# Altium PCB PFSMPS20.PcbDoc (part 2 of 3)
Units mm, origin at the board's own origin, x right, y up, seen from the top; angles counter-clockwise.
Board outline 225.58 x 155.55 mm, 3 copper layers (Top Layer, Mid-Layer 3, Bottom Layer); 286 components, 176 nets, 1075 pads, 309 vias.
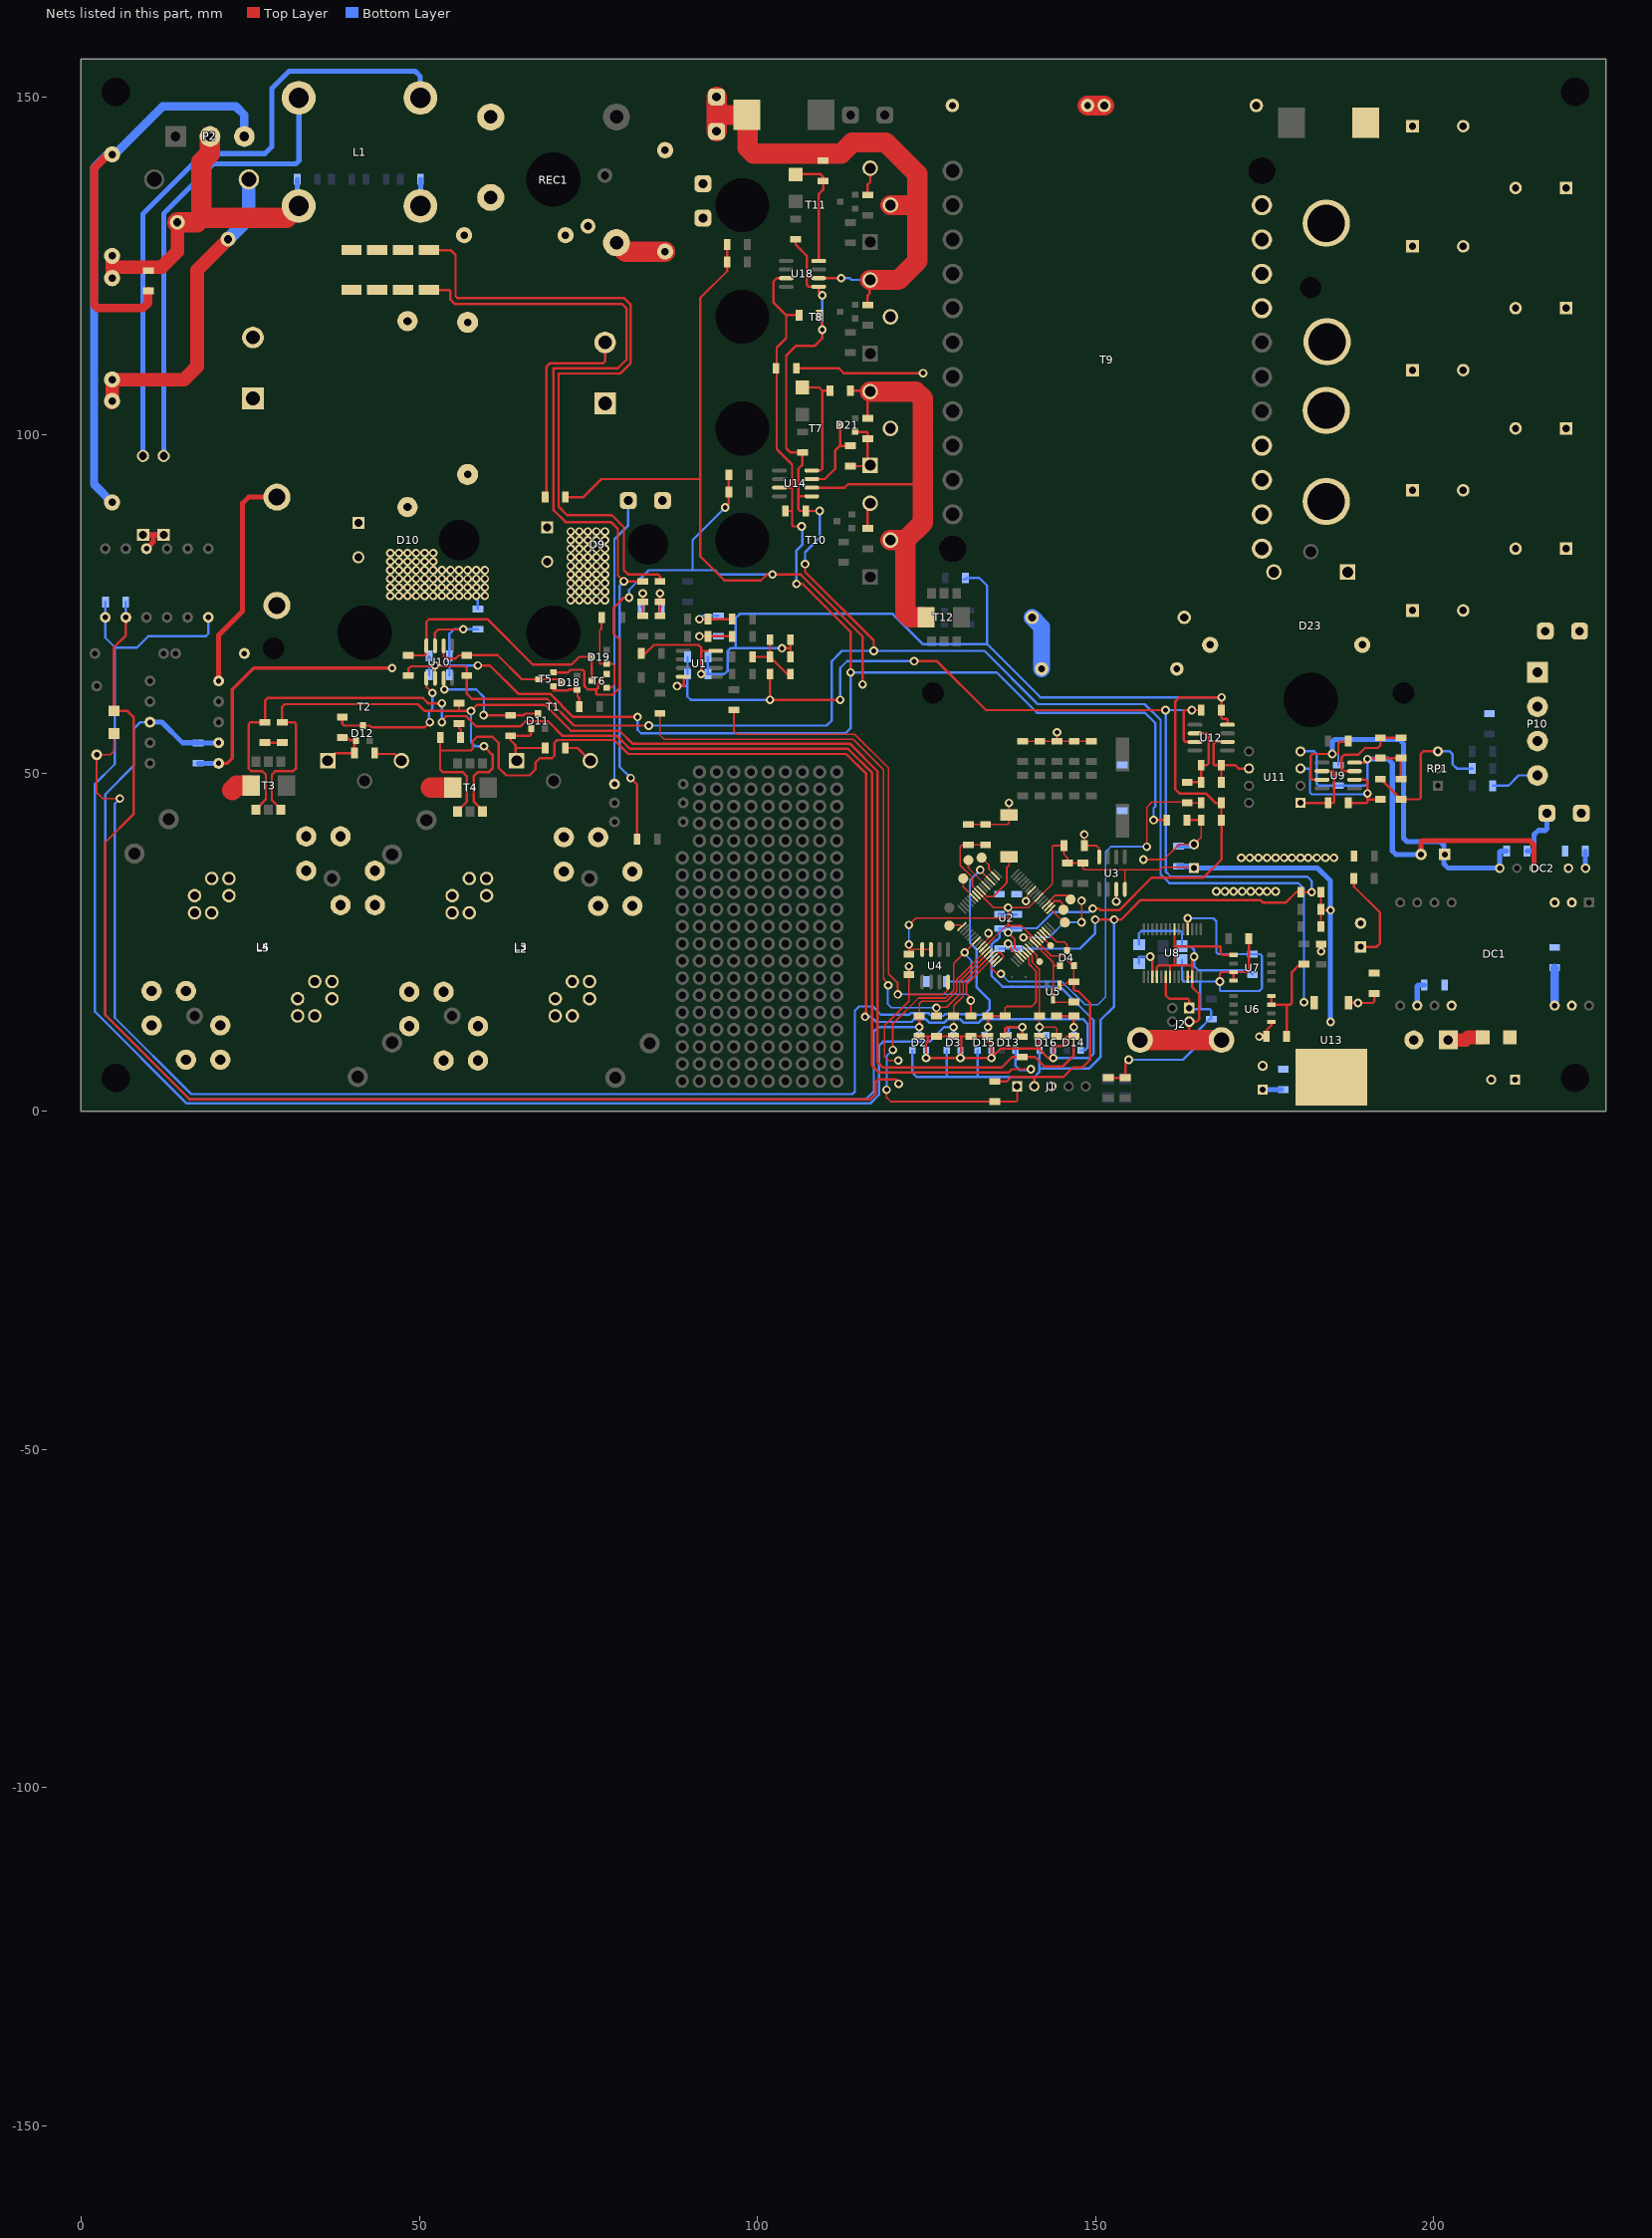
[diagram p2: the nets of this part, all layers, seen from the top]

## Via types
v1: diameter 1.27, hole 0.711, Top Layer to Bottom Layer, 309 vias

## Nets (pads, with @x,y where several pads share a name; then routed paths per layer and width w, separated by ;. In a path a pad name is that pad's centre, name@x,y a point inside that pad or via, vN(x,y) a via of type N, cw(c..) or ccw(c..) an arc to the next point about the centre after c; other vN are vias at no path point)
1: pad.8@128.397,27.432 U2.1 | length 2
  Top Layer w0.254: pad.8@128.397,27.432 128.499,27.534 130.034,27.534 U2.1@130.266,27.302
23: pad.8@141.757,22.123 U2.23 | length 2.6
  Top Layer w0.254: U2.23@140.236,24.12 141.326,23.031 141.326,22.555 pad.8@141.757,22.123
27: U2.27
28: pad.8@143.383,24.509 U2.28 | length 2
  Top Layer w0.254: U2.28@142.004,25.888 pad.8@143.383,24.509
29: U2.29
33: pad.8@145.491,27.915 U2.33 | length 2.9
  Top Layer w0.254: U2.33@143.418,29.848 145.351,27.915 pad.8@145.491,27.915
34: pad.8@145.263,29.794 U2.34 | length 3.6
  Top Layer w0.254: U2.34@143.064,30.201 143.978,31.115 144.729,31.115 145.263,30.582 pad.8@145.263,29.794
35: pad.8@146.329,31.318 U2.35 | length 4.4
  Top Layer w0.254: U2.35@142.711,30.555 144.084,31.928 145.72,31.928 pad.8@146.329,31.318
48V_OUT: C42.1 C43.1 C56.1 C57.1 C58.1 C68.1 C69.1 C71.1 C72.1 C73.2 L8.2 P9.1 P9.2 P10.1 P10.2 R82.1
50: pad.8@133.172,37.49 U2.50 | length 3.5
  Top Layer w0.254: pad.8@133.172,37.49 134.239,36.424 134.239,35.777 135.215,34.801 U2.50@135.215,34.798
54: pad.8@131.216,37.135 U2.54 | length 4.8
  Top Layer w0.254: pad.8@131.216,37.135 131.216,35.968 U2.54@133.801,33.383
58: U2.58
59: pad.8@130.454,34.417 U2.59 | length 3.5
  Top Layer w0.254: pad.8@130.454,34.417 130.454,33.195 U2.59@132.033,31.616
+3.3V: C2.1 C3.2 C13.2 C14.2 C17.2 C18.2 C20.1 C21.1 C22.1 C29.1 C63.1 C66.2 D4.2 J1.2 L7.1 R10.1 R16.1 R17.1 R32.1 R35.1 R75.1 U2.10 U2.26 U2.38 U2.57 U3.8 U4.7 U4.8 U5.1 U6.7 U6.8 U13.2 | length 207.7
  Top Layer w0.254: C20.1@122.428,23.217 122.428,23.876 ; v1(122.428,24.638) 122.428,23.876 ; v1(122.428,27.559) 123.444,28.575 137.096,28.575 ; U4.7@125.666,23.911 U4.8@124.396,23.911 122.463,23.911 122.428,23.876 ; U2.10@133.448,24.12 133.448,24.128 136.751,27.432 137.096,27.432 ; C18.2@133.757,39.394 C14.2@131.217,39.394 130.301,39.394 130.023,39.116 130.023,36.372 131.801,34.594 131.801,33.263 U2.57@132.741,32.323 134.964,30.099 v1(137.096,30.099) ; U5.1@144.714,18.603 145.349,18.603 145.899,19.153 C21.1@146.812,19.153 D4.2@146.812,21.539 146.593,21.539 145.146,22.987 143.49,22.987 U2.26@141.297,25.181 139.045,27.432 137.096,27.432 ; U3.8@154.368,32.803 154.368,35.711 ; C2.1@164.592,35.969 164.493,36.068 159.893,36.068 159.536,35.711 154.368,35.711 ; R32.1@183.364,27.305 R35.1@183.364,29.845 ; L7.1@183.364,32.385 R35.1@183.364,29.845 ; v1(184.785,29.718) 183.491,29.718 R35.1@183.364,29.845 ; 137.096,27.432 137.096,28.575 ; 137.096,28.575 v1(137.096,30.099) ; v1(137.096,30.099) 140.134,30.099 U2.38@141.65,31.616 143.637,33.602 143.637,39.116 143.788,39.267 C22.1@145.375,39.267 145.375,38.021 145.351,37.997 145.859,37.489 R16.1@145.859,36.703 R17.1@148.145,36.703 148.145,35.965 148.399,35.711 154.368,35.711
  Top Layer w0.35: R10.1@135.128,4.421 136.882,4.421 137.541,5.08 140.97,5.08 ; J1.2@140.97,3.683 140.97,5.08 ; C21.1@146.812,19.153 146.812,18.034 147.066,17.78 147.447,17.78 149.225,16.002 149.225,7.62 148.082,6.477 146.685,6.477 145.288,5.08 140.97,5.08 ; U6.8@176.028,17.018 U6.7@176.028,15.748 178.308,15.748 ; C29.1@178.284,11.049 178.308,11.073 178.308,15.748 ; R75.1@180.848,21.741 180.237,21.741 179.07,20.574 179.07,16.002 178.816,15.748 178.308,15.748
  Bottom Layer w0.254: v1(122.428,24.638) v1(122.428,27.559) ; 137.096,29.107 v1(137.096,30.099)
  Bottom Layer w0.35: C17.2@135.826,29.107 137.096,29.107 C13.2@138.366,29.107
  Bottom Layer w0.75: C3.2@162.306,36.219 164.342,36.219 C2.1@164.592,35.969 182.852,35.969 184.785,34.036 v1(184.785,29.718) v1(184.785,13.208) ; C63.1@174.752,3.203 C66.2@177.55,3.203
+3.3V_ANA: C12.2 C16.2 C41.2 C47.2 C75.1 D2.2 D3.2 D15.2 D16.2 L7.2 R8.1 U1.8 U2.19 U12.7 | length 272.2
  Top Layer w0.254: v1(137.096,24.765) 137.096,24.432 U2.19@138.822,22.706
  Top Layer w0.35: v1(88.138,62.865) 89.154,62.865 89.154,64.148 U1.8@89.04,64.262 ; v1@101.854,60.833 v1(101.878,60.833) ; R8.1@101.878,64.643 v1(101.878,60.833) ; v1(112.268,60.833) v1(101.878,60.833) ; v1(123.19,66.548) 126.594,66.548 133.833,59.309 v1(160.376,59.309) ; v1(149.987,28.321) v1(152.781,28.321) 153.797,28.321 156.718,31.242 174.371,31.242 174.752,30.861 178.181,30.861 179.705,32.385 L7.2@180.364,32.385 v1(181.991,32.385) ; U12.7@164.732,54.61 163.322,54.61 163.068,54.864 163.068,59.182 163.195,59.309 v1(164.262,59.309) C75.1@165.632,59.309
  Bottom Layer w0.35: v1(88.138,62.865) 89.662,62.865 ; C47.2@89.686,67.183 C41.2@89.686,64.643 89.662,64.619 89.662,62.865 ; v1(101.878,60.833) 90.17,60.833 89.662,61.341 89.662,62.865 ; v1(112.268,60.833) 112.268,65.532 113.293,66.557 123.181,66.557 v1(123.19,66.548) ; D2.2@122.936,9.017 122.936,5.715 123.571,5.08 128.016,5.08 ; D3.2@128.016,9.017 128.016,5.08 ; D15.2@132.588,9.017 132.588,5.08 ; C12.2@135.826,24.027 137.096,24.027 ; v1(137.096,24.765) 137.096,24.027 ; D16.2@141.732,9.017 141.732,6.35 ; v1(149.987,28.321) 149.987,26.314 147.7,24.027 C16.2@138.366,24.027 137.096,24.027 ; v1(152.781,28.321) 152.781,15.494 150.749,13.462 150.749,8.001 149.098,6.35 141.732,6.35 ; v1(164.262,59.309) 160.401,59.309 160.401,35.433 161.163,34.671 181.356,34.671 181.991,34.036 v1(181.991,32.385) ; 128.016,5.08 132.588,5.08 ; 132.588,5.08 140.97,5.08 141.732,5.842 141.732,6.35
+5V_SEC: C53.1 C61.2 C62.2 DC2.6 R81.1 U9.7 | length 62.9
  Top Layer w0.35: U9.7@183.528,49.022 182.118,49.022 181.864,49.276 181.864,52.578 182.118,52.832 v1(185.039,52.832) 185.801,52.832 185.928,52.959 185.928,54.356 186.182,54.61 187.301,54.61 R81.1@187.428,54.737
  Bottom Layer w0.35: v1(185.039,52.832) 185.801,52.832 185.928,52.705 C62.2@185.928,51.157
  Bottom Layer w0.75: v1(185.039,52.832) 185.039,54.61 185.42,54.991 194.945,54.991 195.58,54.356 195.58,40.386 196.088,39.878 201.041,39.878 201.549,39.37 C53.1@201.549,38.1 ; C53.1@201.676,37.973 C53.1@201.549,38.1 ; C61.2@210.844,38.481 209.931,38.481 209.804,38.354 DC2.6@209.804,35.941 202.184,35.941 201.549,36.576 201.549,37.973 C53.1@201.549,38.1
+5V_USB: C30.1 J2.1 R31.1 R36.1 R37.2 RX_LED1.A TX_LED1.A U7.7 U7.8 U8.4 U8.20 | length 87.6
  Top Layer w0.35: RX_LED1.A@151.892,4.953 TX_LED1.A@154.432,4.953 154.432,7.112 v1(154.94,7.62) ; U8.20@160.401,19.874 160.401,17.145 160.933,16.613 162.119,16.613 163.727,16.613 163.886,16.454 J2.1@163.886,15.251 ; U8.4@163.651,26.924 v1(163.651,28.53) ; v1(168.402,19.177) 168.402,20.32 168.656,20.574 U7.7@170.428,20.574 ; U7.8@170.428,19.304 U7.7@170.428,20.574 ; R36.1@172.72,25.019 172.72,20.828 172.466,20.574 U7.7@170.428,20.574
  Bottom Layer w0.35: v1(154.94,7.62) 162.941,7.62 165.227,9.906 165.227,11.938 166.902,13.613 R31.1@167.132,13.613 167.132,14.859 166.878,15.113 165.481,15.113 ; R37.2@162.817,22.352 162.814,22.349 162.814,19.431 163.068,19.177 165.354,19.177 ; v1(163.651,28.53) 167.431,28.53 167.894,28.067 167.894,23.495 168.172,23.217 C30.1@173.228,23.217 174.395,23.217 174.625,22.987 174.625,18.161 174.244,17.78 168.529,17.78 168.402,17.907 v1(168.402,19.177) 165.354,19.177 ; J2.1@163.886,15.251 164.024,15.113 165.481,15.113 ; 165.354,19.177 165.481,19.05 165.481,15.113
+12V: C44.1 C46.1 C50.1 C52.2 C54.2 C65.2 C81.1 C86.1 DC1.14 DC2.1 R62.1 R63.1 R73.1 R96.1 R112.1 U10.6 U13.3 U14.5 U18.5 | length 302.4
  Top Layer w0.35: R63.1@48.387,64.413 48.387,65.405 48.768,65.786 v1@52.197,65.786 ; U10.6@52.324,64.021 52.324,65.659 v1@52.197,65.786 ; v1(83.947,57.023) 72.898,57.023 68.961,60.96 57.785,60.96 57.023,61.722 R62.1@57.023,64.413 57.023,65.532 56.769,65.786 52.324,65.786 v1@52.197,65.786 ; R112.1@105.664,128.929 105.664,128.143 107.315,126.492 107.315,122.174 107.569,121.92 U18.5@109.08,121.92 109.08,121.171 v1(109.601,120.65) ; v1(107.061,80.899) 107.061,79.756 117.221,69.596 v1(117.221,68.072) ; U14.5@108.064,90.932 106.045,90.932 ; C86.1@109.196,117.729 109.196,116.991 109.601,116.586 v1(109.601,115.57) 109.601,114.3 108.458,113.157 105.664,113.157 104.267,111.76 104.267,98.044 104.878,97.433 R96.1@106.68,97.433 106.68,95.631 106.045,94.996 106.045,90.932 ; v1(109.22,88.773) C81.1@107.164,88.773 106.299,88.773 106.045,89.027 106.045,90.932 ; R73.1@188.568,34.442 188.568,34.417 188.403,34.252 188.248,34.097 188.248,33.214 192.1,29.362 192.1,24.816 191.597,24.313 C50.1@189.23,24.313
  Bottom Layer w0.35: C44.1@51.459,64.516 51.459,65.913 ; C46.1@51.459,67.31 51.459,65.913 ; v1(52.324,65.913) 51.459,65.913 ; v1(83.947,57.023) 110.236,57.023 110.998,57.785 110.998,66.548 112.522,68.072 v1(117.221,68.072) 133.604,68.072 141.478,60.198 157.302,60.198 159.639,57.861 159.639,35.052 160.946,33.745 179.996,33.745 180.848,32.893 v1(180.848,16.129) ; v1(107.061,80.899) 107.061,82.677 109.22,84.836 v1(109.22,88.773) ; v1(109.601,115.57) v1(109.601,120.65)
  Bottom Layer w0.75: DC1.14@197.612,15.621 197.612,18.542 197.739,18.669 C52.2@198.652,18.669 ; C54.2@222.48,38.481 222.48,35.965 DC2.1@222.504,35.941
GND: C2.2 C3.1 C7.1 C8.2 C10.1 C11.2 C13.1 C14.1 C17.1 C18.1 C20.2 C21.2 C22.2 C28.1 C29.2 C50.2 C52.1 C54.1 C63.2 C65.1 C66.1 D4.1 D5.A DC1.16 DC2.2 J1.3 L6.1 L9.2 LED1.K LED2.K LED3.K LED4.K LED5.K LED7.K LED9.K R30.2 R58.2 R101.1 R106.1 R116.1 R120.1 T5.2 T6.2 U2.9 U2.25 U2.41 U3.4 U3.7 U4.4 U5.3 U6.5 U13.1 | length 480.2
  Top Layer w0.254: v1(120.853,7.493) 119.38,7.493 118.821,8.052 118.821,12.649 122.428,16.256 122.428,17.272 ; v1(122.428,21.438) C20.2@122.428,20.217 122.428,17.272 ; U4.4@128.206,19.111 128.206,17.97 127.508,17.272 122.428,17.272 ; C14.1@131.217,42.394 C18.1@133.757,42.394 137.009,42.394 137.223,42.608 C8.2@137.223,43.839 137.223,45.581 v1(137.211,45.593) ; U2.9@133.094,24.474 134.175,25.554 v1(134.175,26.313) ; LED1.K@139.255,54.713 LED2.K@141.795,54.713 LED3.K@144.335,54.713 ; v1(139.354,25.692) 140.143,25.692 140.289,25.546 140.289,25.514 U2.25@140.943,24.86 ; v1(139.735,31.061) 139.936,31.262 139.936,31.99 140.59,32.644 U2.41@140.59,32.676 ; U2.25@140.976,24.827 U2.25@140.943,24.827 143.764,22.006 143.764,21.539 ; v1(144.323,56.032) 144.335,56.02 LED3.K@144.335,54.713 ; D4.1@144.78,21.539 143.764,21.539 ; C21.2@146.812,16.153 146.788,16.129 143.764,16.129 U5.3@143.764,16.703 143.764,21.539 ; v1(147.955,27.94) v1(147.955,31.115) ; v1(148.361,40.919) 148.375,40.906 C22.2@148.375,39.267 150.177,39.267 150.558,38.886 U3.4@150.558,37.603 ; LED5.K@149.415,54.713 LED4.K@146.875,54.713 LED3.K@144.335,54.713 ; v1(153.086,31.013) 153.098,31.025 U3.7@153.098,32.803 ; v1(157.099,37.211) 160.147,37.211 162.405,39.469 C2.2@164.592,39.469 165.632,40.509 L6.1@165.632,43.053 ; v1(183.388,23.622) LED9.K@183.388,24.717
  Top Layer w0.35: R30.2@6.604,73.025 6.604,70.358 4.826,68.58 D5.A@4.826,59.201 4.845,59.182 6.858,59.182 7.747,58.293 7.747,43.942 3.556,39.751 3.556,14.224 16.002,1.778 116.713,1.778 117.475,2.54 117.475,4.318 117.856,4.699 120.523,4.699 120.904,4.318 v1(120.904,4.064) ; T5.2@69.85,64.897 72.009,64.897 72.39,65.278 74.168,65.278 74.422,65.024 74.422,62.865 74.93,62.357 76.2,62.357 ; R58.2@71.604,90.805 74.295,90.805 76.962,93.472 91.567,93.472 ; T6.2@77.724,64.643 76.454,63.373 76.454,62.611 76.2,62.357 ; v1(81.026,75.946) 80.264,75.946 78.74,74.422 78.74,70.612 79.629,69.723 79.629,62.611 78.613,61.595 76.327,61.595 76.2,61.722 76.2,62.357 ; v1(95.25,89.281) 95.782,89.813 R101.1@95.782,91.567 R106.1@95.782,94.107 ; R116.1@95.528,128.143 R120.1@95.528,125.603 95.528,124.23 91.567,120.269 91.567,93.472 ; v1@115.443,62.992 v1(115.57,63.119) 115.57,70.231 106.426,79.375 v1(102.235,79.375) 101.448,79.375 100.559,78.486 95.123,78.486 91.567,82.042 91.567,93.472 ; L9.2@163.552,43.053 L6.1@165.632,43.053 ; v1(174.244,11.049) C29.2@175.284,11.049 175.284,11.962 176.022,12.7 176.022,13.202 U6.5@176.028,13.208 ; C63.2@174.724,6.731 C63.2@174.752,6.703 ; U13.1@187.452,16.041 188.81,16.041 v1(188.849,16.002) 191.008,16.002 191.262,16.256 C65.1@191.262,17.423
  Bottom Layer w0.254: v1(139.354,25.692) 143.167,25.692 145.415,27.94 v1(147.955,27.94)
  Bottom Layer w0.35: R30.2@6.477,72.898 6.58,73.001 6.58,73.025 C28.1@6.58,75.311 ; v1(81.026,75.946) 81.026,77.089 83.947,80.01 90.424,80.01 ; v1(95.25,89.281) 90.424,84.455 90.424,80.01 ; v1(102.235,79.375) 94.361,79.375 93.726,80.01 90.424,80.01
  Bottom Layer w0.75: C3.1@162.306,39.219 164.342,39.219 C2.2@164.592,39.469
  other v1: 167.894,32.512 169.164,32.512 170.434,32.512 171.704,32.512 172.974,32.512 174.244,32.512 175.387,32.512 176.657,32.512 171.577,37.465 172.847,37.465 174.117,37.465 175.387,37.465 176.657,37.465 177.927,37.465 179.07,37.465 180.34,37.465 181.483,37.465 182.753,37.465 184.023,37.465 185.293,37.465
GND_ANA: C4.1 C5.1 C6.1 C9.1 C12.1 C16.1 C37.2 C38.2 C39.1 C40.1 C41.1 C47.1 C48.1 C75.2 C82.1 D2.1 D3.1 D15.1 D16.1 L6.2 R9.1 R53.1 R55.1 R72.1 R99.2 T3.3 T4.3 U1.4 U2.20 U12.4 | length 516.4
  Top Layer w0.254: v1(137.096,26.416) 138.058,25.454 138.058,24.177 U2.20@139.175,23.06
  Top Layer w0.35: T3.3@29.545,44.578 29.545,44.67 28.194,46.021 28.194,49.784 28.702,50.292 31.369,50.292 31.75,50.673 31.75,57.277 31.52,57.507 C39.1@29.718,57.507 29.718,59.817 30.099,60.198 49.784,60.198 50.8,59.182 55.88,59.182 ; C40.1@55.88,60.325 55.88,59.182 ; T4.3@59.367,44.324 59.367,44.519 58.039,45.847 58.039,49.53 58.674,50.165 60.325,50.165 60.833,50.673 60.833,52.705 v1(59.563,53.975) ; R72.1@82.828,67.691 83.439,67.691 84.709,68.961 91.313,68.961 91.694,68.58 91.694,68.072 ; v1(91.694,64.643) 91.694,68.072 ; U1.4@93.84,68.072 91.694,68.072 ; v1(103.632,68.453) 104.878,68.453 ; R9.1@104.878,67.183 104.878,68.453 ; C5.1@104.878,69.723 104.878,68.453 ; C6.1@123.952,11.073 125.349,11.073 ; 141.605,9.271 136.017,9.271 v1(134.62,7.874) ; C38.2@141.732,11.073 141.732,9.144 143.002,7.874 v1(143.764,7.874) 143.764,9.271 144.145,9.652 145.161,9.652 145.542,10.033 145.542,10.795 145.82,11.073 R55.1@146.812,11.073 ; R55.1@146.812,11.176 R55.1@146.812,11.073 ; v1(149.606,29.972) 150.495,29.972 150.749,29.718 153.543,29.718 158.369,34.544 165.989,34.544 168.656,37.211 168.656,43.029 L6.2@168.632,43.053 C82.1@168.632,45.593 167.767,45.593 166.37,46.99 162.433,46.99 161.798,47.625 161.798,60.579 162.433,61.214 v1(168.656,61.214) 168.656,59.333 C75.2@168.632,59.309 168.632,58.19 168.783,58.039 169.418,58.039 169.532,57.925 U12.4@169.532,57.15 ; 55.88,59.182 v1(57.658,59.182) 58.547,60.071 68.632,60.071 72.442,56.261 79.629,56.261 81.534,54.356 113.673,54.356 117.805,50.224 117.805,7.239 118.567,6.477 136.144,6.477 137.692,8.025 R53.1@139.192,8.025 141.073,8.025 142.494,6.604 145.161,6.604 146.812,8.255 R55.1@146.812,11.073 ; 125.349,11.073 C48.1@126.492,11.073 C9.1@129.032,11.073 130.302,11.073 ; 125.349,11.073 125.222,10.946 125.222,10.287 124.968,10.033 v1(124.968,7.874) v1(130.048,7.874) ; v1(130.048,7.874) 130.048,8.763 130.175,8.89 130.175,10.946 130.302,11.073 ; v1(130.048,7.874) v1(134.62,7.874) ; 130.302,11.073 C4.1@131.572,11.073 C37.2@134.112,11.073 134.112,10.287 134.239,10.16 134.62,10.16 v1(134.62,7.874)
  Bottom Layer w0.35: v1(57.658,59.182) 57.658,54.61 58.293,53.975 v1(59.563,53.975) ; v1(91.694,64.643) C41.1@92.686,64.643 ; C47.1@92.686,67.183 C41.1@92.686,64.643 ; C41.1@92.71,64.619 C41.1@92.686,64.643 ; v1(103.632,68.453) 96.774,68.453 ; v1(124.968,7.874) D2.1@124.968,9.017 ; v1(130.048,7.874) D3.1@130.048,9.017 ; R99.2@130.532,78.613 130.786,78.613 130.913,78.74 131.04,78.867 132.842,78.867 133.985,77.724 133.985,69.088 ; v1(134.62,7.874) D15.1@134.62,9.017 ; v1@137.223,26.289 v1(137.096,26.416) C16.1@137.707,27.027 ; C16.1@138.366,27.027 C16.1@137.707,27.027 ; D16.1@143.764,9.017 v1(143.764,7.874) 149.098,7.874 149.733,8.509 149.733,13.462 144.78,18.415 136.271,18.415 134.62,20.066 134.62,24.644 135.249,25.273 135.433,25.273 135.826,25.666 C12.1@135.826,27.027 137.096,27.027 C16.1@137.707,27.027 ; v1(149.606,29.972) 149.098,29.464 143.764,29.464 141.351,27.051 138.366,27.051 137.731,27.051 C16.1@137.707,27.027 ; v1(168.656,61.214) 141.859,61.214 133.985,69.088 ; C41.1@92.686,64.643 95.123,64.643 95.631,65.151 95.631,68.072 96.012,68.453 96.774,68.453 ; 96.774,68.453 96.774,72.898 97.409,73.533 120.015,73.533 124.46,69.088 133.985,69.088
GND_DRV: C44.2 C46.2 C81.2 C86.2 L9.1 R57.2 R94.2 U10.3 U14.3 U18.3 | length 227.5
  Top Layer w0.35: U10.3@52.324,68.821 52.324,70.739 52.832,71.247 56.261,71.247 56.4,71.386 v1@56.515,71.501 ; v1(58.674,65.913) 60.452,65.913 64.643,61.722 69.342,61.722 72.771,58.293 v1(82.296,58.293) ; U14.3@103.264,92.202 105.156,92.202 ; C81.2@104.164,88.749 C81.2@104.164,88.773 105.156,88.773 ; U18.3@104.28,123.19 102.87,123.19 102.362,122.682 102.362,119.634 104.267,117.729 ; v1(105.791,77.978) 106.68,77.978 113.792,70.866 v1(113.792,64.897) ; C86.2@106.196,117.729 104.267,117.729 ; v1(106.553,86.487) 105.283,86.487 105.156,86.614 105.156,88.773 ; v1(158.623,43.053) L9.1@160.552,43.053 ; 104.267,117.729 104.267,114.3 102.87,112.903 102.87,109.855 102.87,97.917 105.156,95.631 105.156,92.202 ; 105.156,88.773 105.156,92.202
  Bottom Layer w0.35: C44.2@54.459,64.516 54.483,64.54 54.483,65.913 ; v1@56.578,71.438 v1@56.642,71.501 ; v1(58.674,65.913) 54.483,65.913 ; R57.2@58.674,71.271 v1(56.515,71.271) 55.142,71.271 54.459,70.588 C46.2@54.459,67.31 54.483,67.286 54.483,65.913 ; v1(82.296,58.293) 82.296,56.388 82.804,55.88 113.03,55.88 113.792,56.642 v1(113.792,64.897) 135.382,64.897 141.351,58.928 157.328,58.928 158.877,57.379 158.877,45.085 158.623,44.831 v1(158.623,43.053) ; v1(105.791,77.978) 105.791,82.931 106.68,83.82 106.68,86.36 v1(106.553,86.487)
GND_GRID: C23.1 C27.2 P2.3 R97.1 | length 114.3
  Top Layer w1.25: C27.2@4.572,141.485 3.944,141.485 1.905,139.446 1.905,119.253 2.413,118.745 9.144,118.745 9.906,119.507 R97.1@9.906,121.309
  Bottom Layer w1.25: C23.1@4.572,90.029 1.905,92.696 1.905,139.573 3.817,141.485 C27.2@4.572,141.485 4.96,141.485 12.065,148.59 22.86,148.59 24.13,147.32 P2.3@24.13,144.145
GND_SEC: C42.2 C43.2 C53.2 C56.2 C57.2 C58.2 C61.1 C62.1 C68.2 C69.2 C71.2 C72.2 C73.1 C77.1 C80.1 DC2.4 P10.3 P10.4 P11.1 P11.2 pad.0@184.15,103.632 pad.0@184.277,113.792 R74.2 R80.2 R87.2 R93.2 T9.14 T9.15 T9.19 T9.20 U9.4 U11.4 | length 90
  Top Layer w0.35: U9.4@188.328,51.562 189.865,51.562 190.309,52.006 190.5,52.197 192.127,52.197 R87.2@192.151,52.221 195.175,52.221 195.187,52.209 195.199,52.197 C77.1@195.199,49.125
  Top Layer w0.75: C53.2@198.176,37.973 198.176,39.807 198.374,40.005 214.249,40.005 214.884,39.37 DC2.4@214.884,35.941
  Bottom Layer w0.35: U11.4@180.34,53.213 182.372,53.213 182.753,52.832 182.753,48.387 182.983,48.157 C62.1@185.928,48.157 189.889,48.157 190.246,48.514 v1(190.246,52.07) ; R93.2@208.764,48.133 211.074,48.133 212.598,49.657 P10.4@215.392,49.657
  Bottom Layer w0.75: v1(190.246,52.07) 193.294,52.07 193.929,51.435 193.929,38.481 194.437,37.973 C53.2@198.176,37.973 ; C61.1@213.844,38.481 214.884,38.481 ; DC2.4@214.884,35.941 214.884,38.481 ; P11.2@216.789,44.069 216.789,41.783 216.535,41.529 215.519,41.529 214.884,40.894 214.884,38.481
GND_USB: C30.2 C31.1 J2.4 J2.5 J2.6 R38.1 U7.5 U8.7 U8.18 U8.21 U8.25 U8.26 | length 74.3
  Top Layer w0.35: U8.18@159.101,19.874 159.101,21.306 159.385,21.59 161.163,21.59 ; U8.21@161.051,19.874 161.051,21.478 161.163,21.59 ; U8.7@161.701,26.924 161.701,24.384 ; U8.25@163.651,19.874 U8.26@164.301,19.874 ; 163.957,10.541 163.886,10.612 J2.4@163.886,13.251 165.016,13.251 165.354,13.589 165.354,17.303 164.301,18.356 U8.26@164.301,19.874 ; v1(164.592,22.86) 164.592,22.733 164.301,22.442 164.301,21.59 ; U7.5@170.428,23.114 168.783,23.114 168.529,23.368 168.529,24.257 168.402,24.384 161.701,24.384 ; 161.163,21.59 161.671,21.59 ; 161.671,21.59 161.701,21.62 161.701,24.384 ; 161.671,21.59 164.301,21.59 ; U8.26@164.301,19.874 164.301,21.59
  Top Layer w3: J2.6@156.616,10.541 163.957,10.541 J2.5@168.656,10.541
  Bottom Layer w0.35: C31.1@156.464,24.641 156.464,26.289 156.845,26.67 162.56,26.67 162.817,26.413 R38.1@162.817,24.384 164.084,24.384 164.592,23.876 v1(164.592,22.86) 164.592,21.463 165.227,20.828 172.617,20.828 C30.2@173.228,20.217
NetC1_1: C1.1 R5.2 R6.1 | length 7.8
  Top Layer w0.35: v1(91.44,72.771) R5.2@92.686,72.771 R6.1@96.29,72.771
  Bottom Layer w0.35: v1(91.44,72.771) 91.924,73.255 C1.1@94.234,73.255
NetC1_2: C1.2 R2.2 R3.1 | length 7.7
  Top Layer w0.35: v1(91.44,70.231) R2.2@92.686,70.231 R3.1@96.29,70.231
  Bottom Layer w0.35: v1(91.44,70.231) 94.21,70.231 C1.2@94.234,70.255
NetC4_2: C4.2 R4.1 U2.14 U2.16 | length 87.3
  Top Layer w0.254: R4.1@96.52,59.333 96.52,56.261 97.028,55.753 114.419,55.753 119.405,50.767 119.405,20.295 120.777,18.923 v1(120.777,17.272) ; C4.2@131.572,14.073 v1(131.572,16.383) ; v1@131.572,16.764 130.937,17.399 130.937,18.796 134.847,22.706 U2.14@134.862,22.706 135.651,23.495 135.89,23.495 136.398,22.987 136.398,22.828 U2.16@135.569,21.999
  Bottom Layer w0.254: v1(120.777,17.272) 120.777,17.282 120.802,17.307 131.029,17.307 131.572,16.764 v1(131.572,16.383)
NetC5_2: C5.2 R7.1 R8.2 R9.2 | length 9.2
  Top Layer w0.35: R7.1@99.29,67.183 R9.2@101.878,67.183 ; C5.2@101.878,69.723 R9.2@101.878,67.183 ; R8.2@104.878,64.643 104.418,64.643 R9.2@101.878,67.183
NetC6_2: C6.2 C36.2 D2.3 R48.2 R50.1 U2.11 | length 212.4
  Top Layer w0.254: C6.2@123.952,14.073 123.952,15.875 124.333,16.256 128.023,16.256 129.486,17.719 129.486,19.451 U2.11@133.801,23.767
  Top Layer w0.35: v1(123.952,12.446) C6.2@123.952,14.073
  Top Layer w0.75: R50.1@20.32,54.61 R50.1@20.447,54.61
  Bottom Layer w0.35: R48.2@10.16,57.531 8.763,57.531 7.747,56.515 7.747,51.054 3.556,46.863 3.556,14.224 16.002,1.778 116.078,1.778 117.221,2.921 117.221,11.795 117.872,12.446 v1(123.952,12.446) D2.3@123.952,11.227
  Bottom Layer w0.75: R48.2@10.16,57.531 11.938,57.531 14.986,54.483 17.248,54.483 C36.2@17.272,54.459 20.296,54.459 R50.1@20.32,54.483
NetC7_2: C7.2 J1.1 R10.2 U2.7 | length 60.9
  Top Layer w0.254: v1(119.126,3.175) 119.126,2.032 119.737,1.421 R10.2@135.128,1.421 138.327,1.421 138.43,1.524 J1.1@138.43,3.683 ; v1(120.04,9.068) 120.04,12.929 123.85,16.739 127.864,16.739 129.032,17.907 129.032,21.858 v1(130.669,23.495) 132.355,25.181 U2.7@132.387,25.181 U2.7@132.387,25.148
  Bottom Layer w0.3: v1(119.126,3.175) 119.126,8.153 v1(120.04,9.068) ; C7.2@127.992,19.177 131.14,19.177 131.674,19.71 131.674,22.25 130.669,23.255 v1(130.669,23.495)
NetC8_1: C8.1 U2.56 | length 9
  Top Layer w0.254: U2.56@133.094,32.676 133.094,32.644 133.748,31.99 133.748,31.987 133.985,31.75 134.874,31.75 136.906,33.782 136.906,36.068 137.223,36.385 C8.1@137.223,37.639
NetC9_2: C9.2 C28.2 D3.3 R28.2 R29.1 U2.13 | length 235.1
  Top Layer w0.254: v1(129.032,12.446) C9.2@129.032,14.073 129.032,15.621 130.429,17.018 130.429,18.98 U2.13@134.508,23.06
  Bottom Layer w0.35: C28.2@3.58,75.311 3.556,75.287 R29.1@3.556,73.025 3.556,70.021 5.029,68.548 8.223,68.548 9.906,70.231 18.415,70.231 18.796,70.612 R28.2@18.796,73.025 ; 4.953,68.548 4.953,51.308 2.032,48.387 2.032,14.732 15.621,1.143 116.713,1.143 117.983,2.413 117.983,9.652 118.618,10.287 125.476,10.287 127.635,12.446 v1(129.032,12.446) D3.3@129.032,11.227
NetC23_2: C23.2 C24.2 F1.2 L1.1 R18.1 VR1.1 | length 51.6
  Top Layer w2: C23.2@4.445,104.775 4.572,104.902 C23.2@4.572,105.029 C24.2@4.572,108.197 15.233,108.197 17.145,110.109 17.145,124.366 VR1.1@21.724,128.945
  Bottom Layer w0.75: L1.1@50.165,133.86 50.185,133.88 R18.1@50.185,137.795
  Bottom Layer w2: VR1.1@21.724,128.945 24.795,132.016 F1.2@24.795,137.795
NetC24_1: C24.1 C27.1 L1.3 P2.2 R24.2 R97.2 VR1.2 | length 55.1
  Top Layer w2: C24.1@4.572,123.197 4.572,124.841 ; C27.1@4.572,126.485 4.572,124.841 ; VR1.2@14.224,131.445 14.224,127.127 11.938,124.841 9.906,124.841 4.572,124.841 ; L1.3@31.655,133.35 L1.3@32.165,133.86
  Top Layer w3: VR1.2@14.224,131.445 17.145,131.445 17.78,132.08 ; P2.2@19.05,144.145 19.05,141.605 17.78,140.335 17.78,132.08 ; L1.3@32.165,133.86 30.385,132.08 17.78,132.08
  Bottom Layer w0.75: L1.3@31.655,133.35 31.945,133.64 L1.3@31.945,133.86 ; R24.2@31.945,137.795 31.945,134.08 L1.3@32.165,133.86
NetC25_1: C25.1 D7.1 L1.4 REC1.4 | length 68.4
  Bottom Layer w0.75: D7.1@12.192,96.901 12.192,132.715 19.558,140.081 31.75,140.081 32.214,140.545 32.214,149.811 L1.4@32.165,149.86
NetC25_2: C25.2 D6.1 L1.2 REC1.2 | length 101.9
  Top Layer w3: REC1.2@79.168,128.427 80.475,127.12 C25.2@86.36,127.12
  Bottom Layer w0.75: D6.1@9.144,96.901 9.144,132.715 18.034,141.605 27.178,141.605 28.194,142.621 28.194,151.257 30.734,153.797 49.403,153.797 50.165,153.035 L1.2@50.165,149.86
NetC26_1: C26.1 NTC1.2 R59.1 R60.1 R61.1 R66.1 R124.1 | length 100.2
  Top Layer w0.35: R124.1@51.403,127.344 54.647,127.344 55.372,126.619 55.372,120.523 55.626,120.269 80.264,120.269 81.28,119.253 81.28,110.617 79.756,109.093 70.612,109.093 70.612,89.408 71.882,88.138 78.486,88.138 80.264,86.36 80.264,80.01 80.899,79.375 85.344,79.375 85.598,79.121 R66.1@85.598,78.335
NetC26_2: C26.2 D8.A L2.7 L2.8 L2.9 L2.10 L2.11 L2.12 L3.7 L3.8 L3.9 L3.10 L3.11 L3.12 L4.7 L4.8 L4.9 L4.10 L4.11 L4.12 L5.7 L5.8 L5.9 L5.10 L5.11 L5.12 R19.1 REC1.1
NetC31_2: C31.2 U8.17 | length 5.8
  Top Layer w0.35: v1(158.115,22.86) 158.115,22.733 158.451,22.397 U8.17@158.451,19.874
  Bottom Layer w0.35: C31.2@156.464,21.841 156.464,22.86 v1(158.115,22.86)
NetC32_1: C32.1 C33.1 C34.2 C35.2 D8.K D9.1 D10.1 P4.1 P4.2 R39.1 R40.1 T7.2 T8.2 | length 76
  Top Layer w0.75: R40.1@20.32,63.627 20.32,70.409 23.876,73.965 23.876,89.916 24.765,90.805 D8.K@28.956,90.805
  Bottom Layer w0.35: R39.1@78.867,48.387 78.867,84.582 80.899,86.614 P4.1@80.899,90.297
NetC32_2: C32.2 C33.2 C34.1 C35.1 C36.1 LED6.K P5.1 P5.2 R45.1 R46.2 R56.2 R57.1 R58.1 R59.2 R60.2 R61.2 R69.1 R91.2 R92.1 R94.1 R124.2 T1.3 T2.3 T10.3 T11.3 | length 241.8
  Top Layer w0.35: R46.2@43.41,52.959 43.537,52.832 46.373,52.832 T2.3@47.366,51.839 ; R124.2@51.403,121.444 54.451,121.444 54.61,121.285 54.61,120.015 55.245,119.38 80.01,119.38 80.645,118.745 80.645,111.125 79.375,109.855 69.85,109.855 69.85,88.9 71.628,87.122 78.359,87.122 79.375,86.106 79.375,79.224 80.252,78.347 80.264,78.335 R69.1@83.058,78.335 ; R58.1@68.834,90.551 68.834,90.805 68.834,110.109 69.342,110.617 77.216,110.617 77.479,110.88 C33.2@77.479,113.674 ; R45.1@71.604,53.721 73.424,53.721 T1.3@75.306,51.839 ; v1(81.28,49.276) 82.217,48.339 LED6.K@82.217,40.259 ; R94.1@105.767,109.855 112.065,109.855 112.776,109.144 v1(124.511,109.144) ; R91.2@116.332,86.185 116.332,89.553 T10.3@116.69,89.911 ; R92.1@116.332,135.485 116.332,137.033 116.713,137.414 116.713,139.418 T11.3@116.69,139.441
  Top Layer w0.5: R56.2@20.32,51.435 21.59,51.435 22.352,52.197 22.352,62.357 25.527,65.532 v1(45.974,65.532)
  Bottom Layer w0.35: v1(58.42,76.2) 58.42,75.692 58.674,75.438 R57.1@58.674,74.271 ; v1(80.264,78.359) 79.629,77.724 79.629,50.927 v1(81.28,49.276)
  Bottom Layer w0.75: C36.1@17.272,51.459 17.296,51.435 R56.2@20.32,51.435
  other v1: 72.39,75.565 73.66,75.565 74.93,75.565 76.2,75.565 77.47,75.565 45.72,76.2 46.99,76.2 48.26,76.2 49.53,76.2 50.8,76.2 52.07,76.2 53.34,76.2 54.61,76.2 55.88,76.2 57.15,76.2 59.69,76.2 72.39,76.835 73.66,76.835 74.93,76.835 76.2,76.835 77.47,76.835 45.72,77.47 46.99,77.47 48.26,77.47 49.53,77.47 50.8,77.47 52.07,77.47 53.34,77.47 54.61,77.47 55.88,77.47 57.15,77.47 58.42,77.47 59.69,77.47 72.39,78.105 73.66,78.105 74.93,78.105 76.2,78.105 77.47,78.105 45.72,78.74 46.99,78.74 48.26,78.74 49.53,78.74 50.8,78.74 52.07,78.74 53.34,78.74 54.61,78.74 55.88,78.74 57.15,78.74 58.42,78.74 59.69,78.74 72.39,79.375 73.66,79.375 74.93,79.375 76.2,79.375 77.47,79.375 45.72,80.01 46.99,80.01 48.26,80.01 49.53,80.01 50.8,80.01 52.07,80.01 53.34,80.01 54.61,80.01 55.88,80.01 57.15,80.01 58.42,80.01 59.69,80.01 72.39,80.645 73.66,80.645 74.93,80.645 76.2,80.645 77.47,80.645 45.72,81.28 46.99,81.28 48.26,81.28 49.53,81.28 50.8,81.28 52.07,81.28 72.39,81.915 73.66,81.915 74.93,81.915 76.2,81.915 77.47,81.915 45.72,82.55 46.99,82.55 48.26,82.55 49.53,82.55 50.8,82.55 52.07,82.55 72.39,83.185 73.66,83.185 74.93,83.185 76.2,83.185 77.47,83.185 72.39,84.455 73.66,84.455 74.93,84.455 76.2,84.455 77.47,84.455 72.39,85.725 73.66,85.725 74.93,85.725 76.2,85.725 77.47,85.725
NetC37_1: C37.1 D15.3 R49.1 U2.21 | length 19.7
  Top Layer w0.254: R49.1@136.652,14.073 136.652,15.24 136.906,15.494 140.589,15.494 141.224,16.129 141.224,20.726 140.183,21.768 140.183,22.727 139.529,23.381 U2.21@139.529,23.413
  Top Layer w0.35: v1(134.112,12.446) C37.1@134.112,14.073 R49.1@136.652,14.073
  Bottom Layer w0.35: D15.3@133.604,11.227 133.604,11.557 134.112,12.065 v1(134.112,12.446)
NetC38_1: C38.1 D16.3 R51.1 U2.22 | length 18
  Top Layer w0.254: U2.22@139.882,23.767 140.64,23.009 140.64,22.047 141.732,20.955 C38.1@141.732,14.073 v1(141.732,12.446) 144.018,12.446 144.272,12.192 R51.1@144.272,11.073
  Bottom Layer w0.35: v1(141.732,12.446) 141.732,11.43 141.935,11.227 D16.3@142.748,11.227
NetC39_2: C39.2 R52.1 | length 2.5
  Top Layer w0.35: R52.1@27.178,54.507 29.694,54.507 29.706,54.495 C39.2@29.718,54.483
NetC40_2: C40.2 R54.1 | length 2.2
  Top Layer w0.35: C40.2@55.88,57.325 55.88,56.642 56.134,56.388 56.134,55.269 R54.1@56.11,55.245
NetC45_1: C45.1 R69.2 R70.1 | length 5.7
  Top Layer w0.35: R70.1@83.058,73.255 R69.2@83.058,75.335 v1(83.058,76.581) ; R69.2@83.312,75.335 R69.2@83.312,75.589
  Bottom Layer w0.35: C45.1@82.828,74.549 83.058,74.779 v1(83.058,76.581)
NetC45_2: C45.2 R66.2 R67.1 | length 5.5
  Top Layer w0.35: R67.1@85.598,73.255 R66.2@85.598,75.335 v1(85.598,76.581)
  Bottom Layer w0.35: v1(85.598,76.581) 85.598,74.779 C45.2@85.828,74.549
NetC48_2: C48.2 R68.1 U2.12 | length 94.1
  Top Layer w0.254: R68.1@85.598,58.825 85.598,55.626 86.233,54.991 114.165,54.991 118.669,50.487 118.669,19.558 119.355,18.872 v1(119.355,18.618) ; C48.2@126.492,14.073 v1(126.492,15.291) 126.568,15.367 128.016,15.367 129.94,17.291 129.94,19.198 U2.12@134.155,23.413
  Bottom Layer w0.254: v1(119.355,18.618) 119.304,18.567 119.304,15.824 119.837,15.291 v1(126.492,15.291)
NetC49_1: C49.1 C51.2 D20.K DC1.22 DC1.23 | length 5.6
  Bottom Layer w1.25: DC1.22@217.932,15.621 C51.2@217.932,21.233
NetC49_2: C49.2 C51.1 DC1.2 DC1.3 P6.2
NetC59_1: C59.1 R74.1 | length 8.2
  Bottom Layer w2.54: C59.1@140.642,73.025 142.052,71.615 R74.1@142.052,65.405
NetC59_2: C59.2 D23.3 pad.0@184.15,90.17 T9.12 T9.13
NetC70_1: C70.1 R80.1 | length 2.5
  Top Layer w3: R80.1@148.844,148.717 C70.1@151.31,148.717
NetC70_2: C70.2 D23.1 pad.0@184.15,131.318 T9.21 T9.22
NetC74_1: C74.1 R84.1 R85.2 U12.6 | length 12.3
  Top Layer w0.35: R85.2@163.576,48.617 163.6,48.641 R84.1@165.632,48.641 C74.1@165.632,51.181 166.497,51.181 166.751,51.435 166.751,55.626 166.497,55.88 U12.6@164.732,55.88 ; C74.1@165.505,51.435 C74.1@165.632,51.435
NetC74_2: C74.2 R84.2 U11.6 U12.2 | length 13.2
  Top Layer w0.35: R84.2@168.632,48.641 C74.2@168.632,51.181 ; U12.2@169.532,54.61 167.767,54.61 167.513,54.356 167.513,51.308 167.64,51.181 C74.2@168.632,51.181 ; U11.6@172.72,50.673 171.196,50.673 170.688,51.181 C74.2@168.632,51.181
NetC76_1: C76.1 U9.6 U11.1 | length 11.4
  Top Layer w0.35: U11.1@180.34,45.593 C76.1@184.428,45.593 ; U9.6@183.528,50.292 185.166,50.292 185.293,50.165 185.293,45.72 185.166,45.593 C76.1@184.428,45.593 ; C76.1@184.531,45.593 C76.1@184.428,45.593
NetC76_2: C76.2 R83.1 U9.2 U11.3 | length 23.4
  Top Layer w0.35: C76.2@187.428,45.593 190.119,45.593 190.246,45.72 190.246,46.101 ; U9.2@188.328,49.022 189.992,49.022 190.246,48.768 v1(190.246,46.99) 190.246,46.101 ; R83.1@192.151,46.125 192.127,46.101 190.246,46.101
  Bottom Layer w0.35: U11.3@180.34,50.673 181.61,50.673 181.737,50.546 181.737,47.117 181.991,46.863 190.119,46.863 v1(190.246,46.99)
NetC77_2: C77.2 R83.2 R88.2 RP1.3 | length 23.5
  Top Layer w0.35: R83.2@192.151,49.125 192.199,49.125 C77.2@195.199,46.125 197.89,46.125 198.12,46.355 198.12,52.832 198.501,53.213 RP1.3@200.66,53.213
  Bottom Layer w0.35: RP1.3@200.66,53.213 202.438,53.213 202.819,52.832 202.819,51.308 203.454,50.673 R88.2@205.764,50.673
NetC79_1: C79.1 R79.1 T7.3 T10.2 T12.7 U14.6 | length 69.8
  Top Layer w0.35: U14.6@108.064,92.202 112.903,92.202 113.411,92.71 124.333,92.71 124.46,92.583 ; C79.1@113.768,106.553 116.558,106.553 T7.3@116.69,106.421 116.332,106.063 R79.1@116.332,102.465
  Top Layer w3: T7.3@116.69,106.421 123.449,106.421 124.46,105.41 124.46,92.583 124.46,87 121.92,84.46 121.92,84.455 ; T10.2@119.69,84.46 119.696,84.455 121.92,84.455 ; T12.7@124.46,73.025 122.555,73.025 121.92,73.66 121.92,84.455
NetC79_2: C79.2 D30.K U14.8 | length 17.5
  Top Layer w0.35: D30.K@106.68,107.029 109.125,107.029 109.601,106.553 ; U14.8@108.064,94.742 109.347,94.742 109.601,94.996 109.601,106.553 ; C79.2@110.768,106.553 109.601,106.553
NetC80_2: C80.2 R87.1 U9.3 | length 14.7
  Top Layer w0.35: U9.3@188.328,50.292 186.69,50.292 186.436,50.546 186.436,52.324 186.817,52.705 188.849,52.705 189.865,53.721 191.77,53.721 192.151,54.102 R87.1@192.151,55.221 192.151,55.245 195.199,55.245 195.326,55.245 C80.2@195.453,55.118
NetC82_2: C82.2 R85.1 U2.15 | length 63
  Top Layer w0.254: U2.15@135.215,22.352 134.567,21.704 134.567,21.201 135.447,20.32 v1(136.017,20.32) ; v1(157.607,39.116) 157.607,44.958 158.369,45.72 163.171,45.72 R85.1@163.322,45.871 ; R85.1@163.576,45.617 163.6,45.593 C82.2@165.632,45.593 ; C82.2@165.608,46.125 C82.2@165.632,46.101
  Bottom Layer w0.254: v1(136.017,20.32) 137.16,19.177 145.034,19.177 148.463,15.748 150.368,15.748 151.511,16.891 151.511,38.354 152.273,39.116 v1(157.607,39.116)
NetC85_1: C85.1 L10.2 P7.1 P7.2 R78.2 T8.3 T11.2 U18.6 | length 79.5
  Top Layer w0.35: U18.6@109.08,123.19 v1(112.395,123.19) ; R78.2@116.332,119.229 116.332,120.65 116.586,120.904 116.586,122.827 T8.3@116.69,122.931 T8.3@116.431,123.19
  Top Layer w3: P7.1@93.98,144.907 93.98,147.32 ; P7.2@93.98,149.987 93.98,147.32 ; T8.3@116.69,122.931 120.899,122.931 123.698,125.73 123.698,133.985 ; T11.2@119.69,133.99 123.693,133.99 123.698,133.985 ; 93.98,147.32 L10.2@98.425,147.32 98.552,147.193 98.552,142.494 99.441,141.605 109.728,141.605 112.395,141.605 114.046,143.256 118.999,143.256 123.698,138.557 123.698,133.985
  Bottom Layer w0.35: v1(112.395,123.19) 113.665,123.19 113.919,122.936 116.685,122.936 T8.3@116.69,122.931
NetC85_2: C85.2 D36.K U18.8 | length 16.9
  Top Layer w0.35: D36.K@105.664,138.525 105.696,138.557 109.347,138.557 109.728,138.176 C85.2@109.728,137.565 109.728,136.271 109.08,135.623 U18.8@109.08,125.73
NetD4_3: D4.3 U2.30 | length 4.8
  Top Layer w0.254: U2.30@142.711,26.595 144.287,25.019 145.415,25.019 145.796,24.638 D4.3@145.796,23.749
NetD5_K: D5.K R23.2 U2.52 | length 219.9
  Top Layer w0.254: D5.K@4.826,55.831 4.826,53.213 4.318,52.705 R23.2@2.286,52.705 2.286,47.117 3.175,46.228 v1(5.715,46.228) ; v1(132.969,35.687) 132.969,35.63 U2.52@134.508,34.09
  Bottom Layer w0.35: v1(5.715,46.228) 4.953,45.466 4.953,13.843 16.256,2.54 114.046,2.54 114.427,2.921 114.427,14.859 115.062,15.494 117.094,15.494 118.302,14.286 122.49,14.286 122.682,14.478 125.349,14.478 125.73,14.097 127.508,14.097 127.762,14.351 130.683,14.351 130.937,14.097 132.334,14.097 132.523,14.286 133.539,14.286 134.366,15.113 134.366,16.383 132.461,18.288 132.461,23.876 131.445,24.892 131.445,34.163 v1(132.969,35.687)
NetD6_2: D6.2 D7.2 R25.1 | length 8.8
  Top Layer w0.75: D6.2@9.144,85.251 9.178,85.217 10.668,85.217 ; R25.1@9.652,83.185 10.668,84.201 10.668,85.217 ; D7.2@12.192,85.251 12.158,85.217 10.668,85.217
  Bottom Layer w0.75: D6.2@9.144,85.251 D7.2@12.192,85.251 ; R25.1@9.652,83.312 R25.1@9.779,83.439
NetD9_2: D9.2 L2.1 L2.2 L2.3 L2.4 L2.5 L2.6 L3.1 L3.2 L3.3 L3.4 L3.5 L3.6 T4.8 | length 2.9
  Top Layer w3: 51.689,47.879 T4.8@54.61,47.879
NetD10_2: D10.2 L4.1 L4.2 L4.3 L4.4 L4.5 L4.6 L5.1 L5.2 L5.3 L5.4 L5.5 L5.6 T3.8 | length 2.8
  Top Layer w3: 22.352,47.498 22.987,48.133 T3.8@24.892,48.133
NetD11_1: D11.1 R43.2 R45.2 T1.1 | length 12.5
  Top Layer w0.35: T1.1@64.516,51.95 T1.1@64.406,51.839 64.262,51.983 64.262,53.721 ; D11.1@66.548,56.591 66.548,55.753 66.318,55.523 R43.2@63.5,55.523 63.5,54.864 64.262,54.102 64.262,53.721 ; R45.2@68.604,53.721 64.262,53.721
NetD11_3: D11.3 R43.1 U10.7 | length 18.9
  Top Layer w0.35: U10.7@53.594,64.021 53.594,62.484 v1(53.721,62.357) ; v1(59.512,58.572) 59.562,58.523 R43.1@63.5,58.523 63.524,58.547 65.405,58.547 65.659,58.801 D11.3@67.564,58.801
  Bottom Layer w0.35: v1(53.721,62.357) 58.42,62.357 59.563,61.214 59.563,58.623 v1(59.512,58.572)
NetD12_1: D12.1 R44.1 R46.1 T2.1 | length 8.8
  Top Layer w0.35: T2.1@36.489,51.816 T2.1@36.466,51.839 ; T2.1@36.576,51.95 T2.1@36.466,51.839 ; R44.1@38.608,55.269 39.346,55.269 39.751,54.864 40.589,54.864 D12.1@40.64,54.813 40.64,54.356 40.386,54.102 40.386,52.983 R46.1@40.41,52.959 37.585,52.959 T2.1@36.466,51.839
NetD12_3: D12.3 R44.2 U10.5 | length 21.6
  Top Layer w0.35: R44.2@38.608,58.269 38.608,57.277 38.862,57.023 D12.3@41.656,57.023 42.672,57.023 42.926,56.769 50.8,56.769 v1(51.562,57.531) ; U10.5@51.054,64.021 51.054,62.738 v1(51.943,61.849)
  Bottom Layer w0.35: v1(51.562,57.531) 51.435,57.658 51.435,59.055 51.943,59.563 v1(51.943,61.849)
NetD13_1: D13.1 R52.2 T3.1 | length 191
  Top Layer w0.35: T3.1@25.845,44.578 25.845,44.67 27.305,46.131 27.305,49.784 26.797,50.292 25.146,50.292 24.765,50.673 24.765,57.277 25.019,57.531 27.154,57.531 R52.2@27.178,57.507 27.178,60.706 27.559,61.087 50.546,61.087 51.308,60.325 v1(53.34,60.325) ; v1(53.34,57.531) 53.34,57.785 53.975,58.42 56.896,58.42 58.42,56.896 64.96,56.896 65.722,57.658 69.056,57.658 71.215,55.499 79.248,55.499 81.153,53.594 113.411,53.594 116.992,50.013 116.992,6.731 118.008,5.715 137.16,5.715 137.668,6.223 v1(140.462,6.223)
  Bottom Layer w0.35: v1(53.34,57.531) v1(53.34,60.325) ; D13.1@138.176,9.017 138.176,6.731 138.811,6.096 140.335,6.096 v1(140.462,6.223)
NetD13_3: D13.3 R49.2 R53.2 | length 8.6
  Top Layer w0.35: R49.2@136.652,11.073 136.652,12.192 136.906,12.446 v1(139.192,12.446) R53.2@139.192,11.025
  Bottom Layer w0.35: D13.3@137.16,11.557 D13.3@137.16,11.227 137.16,12.192 137.414,12.446 v1(139.192,12.446)
NetD14_1: D14.1 R54.2 T4.1 | length 165.4
  Top Layer w0.35: R54.2@53.11,55.245 53.086,55.221 53.086,53.34 ; T4.1@55.666,44.324 55.666,44.416 57.023,45.773 57.023,49.53 56.388,50.165 53.467,50.165 53.086,50.546 53.086,53.34 ; v1(115.951,13.97) 116.103,14.122 116.103,49.878 113.149,52.832 80.899,52.832 78.835,54.896 70.39,54.896 69.977,54.483 69.977,52.578 69.596,52.197 67.818,52.197 67.183,51.562 67.183,50.546 66.294,49.657 62.865,49.657 61.722,50.8 61.722,54.483 60.833,55.372 58.547,55.372 57.912,54.737 57.912,53.594 57.658,53.34 53.086,53.34
  Bottom Layer w0.35: v1@116.205,13.716 v1(115.951,13.97) 116.84,13.97 117.602,13.208 122.809,13.208 123.19,13.589 124.968,13.589 125.476,13.081 127.635,13.081 128.143,13.589 130.048,13.589 130.556,13.081 132.715,13.081 133.223,13.589 148.209,13.589 148.844,12.954 148.844,9.398 148.463,9.017 D14.1@147.828,9.017
NetD14_3: D14.3 R51.2 R55.2 | length 5.6
  Top Layer w0.35: R51.2@144.272,14.073 R55.2@146.812,14.073 R55.2@146.915,14.073 ; v1(146.812,12.446) 146.812,13.97 146.864,14.022 R55.2@146.915,14.073 ; R55.2@146.939,14.097 R55.2@146.915,14.073
  Bottom Layer w0.35: D14.3@146.812,11.227 v1(146.812,12.446)
NetD18_1: D18.1 R64.2 T5.1 | length 6.9
  Top Layer w0.35: T5.1@69.85,62.865 69.85,62.23 72.009,62.23 72.136,62.357 D18.1@73.33,62.357 73.406,62.281 73.406,61.341 73.684,61.063 R64.2@73.684,59.817
NetD18_3: D18.3 R62.2 T5.3 U10.2 | length 21.2
  Top Layer w0.35: U10.2@53.594,68.821 53.594,67.183 53.848,66.929 55.372,66.929 55.856,67.413 R62.2@57.023,67.413 57.047,67.437 61.595,67.437 65.151,63.881 T5.3@67.64,63.881 70.612,63.881 D18.3@71.12,63.373
NetD19_1: D19.1 R71.2 T6.1 | length 13.4
  Top Layer w0.254: R71.2@76.986,73.025 76.962,73.001 76.962,71.374 76.708,71.12 76.708,66.167 D19.1@77.724,66.167 78.613,66.167 78.867,65.913 78.867,63.119 78.359,62.611 T6.1@77.724,62.611
NetD19_3: D19.3 R63.2 T6.3 U10.4 | length 38.9
  Top Layer w0.35: R63.2@48.387,67.413 50.776,67.413 51.054,67.691 U10.4@51.054,68.821 51.054,72.39 51.435,72.771 60.071,72.771 66.802,66.04 72.517,66.04 73.66,67.183 D19.3@75.514,67.183 T6.3@75.514,63.627
NetD20_A: D20.A P6.1 | length 5.3
  Top Layer w2: P6.1@202.184,10.541 204.724,10.541 205.105,10.922 D20.A@207.296,10.922
NetD21_1: D21.1 R76.2 R79.2 T7.1 | length 9.9
  Top Layer w0.35: R76.2@113.792,95.401 T7.1@116.571,95.401 ; D21.1@114.478,100.457 116.205,100.457 116.332,100.33 R79.2@116.332,99.465 116.332,95.639 T7.1@116.57,95.401 ; T7.1@116.69,95.521 T7.1@116.571,95.401
NetD21_3: D21.3 R76.1 U14.7 | length 12.4
  Top Layer w0.35: U14.7@108.064,93.472 109.982,93.472 111.506,94.996 111.506,97.663 112.244,98.401 ; D21.3@112.268,101.473 112.244,101.449 112.244,98.401 ; R76.1@113.792,98.401 112.244,98.401